# EAGLE board DataloggerE7 (EAGLE 9.3.1), part 1 of 2
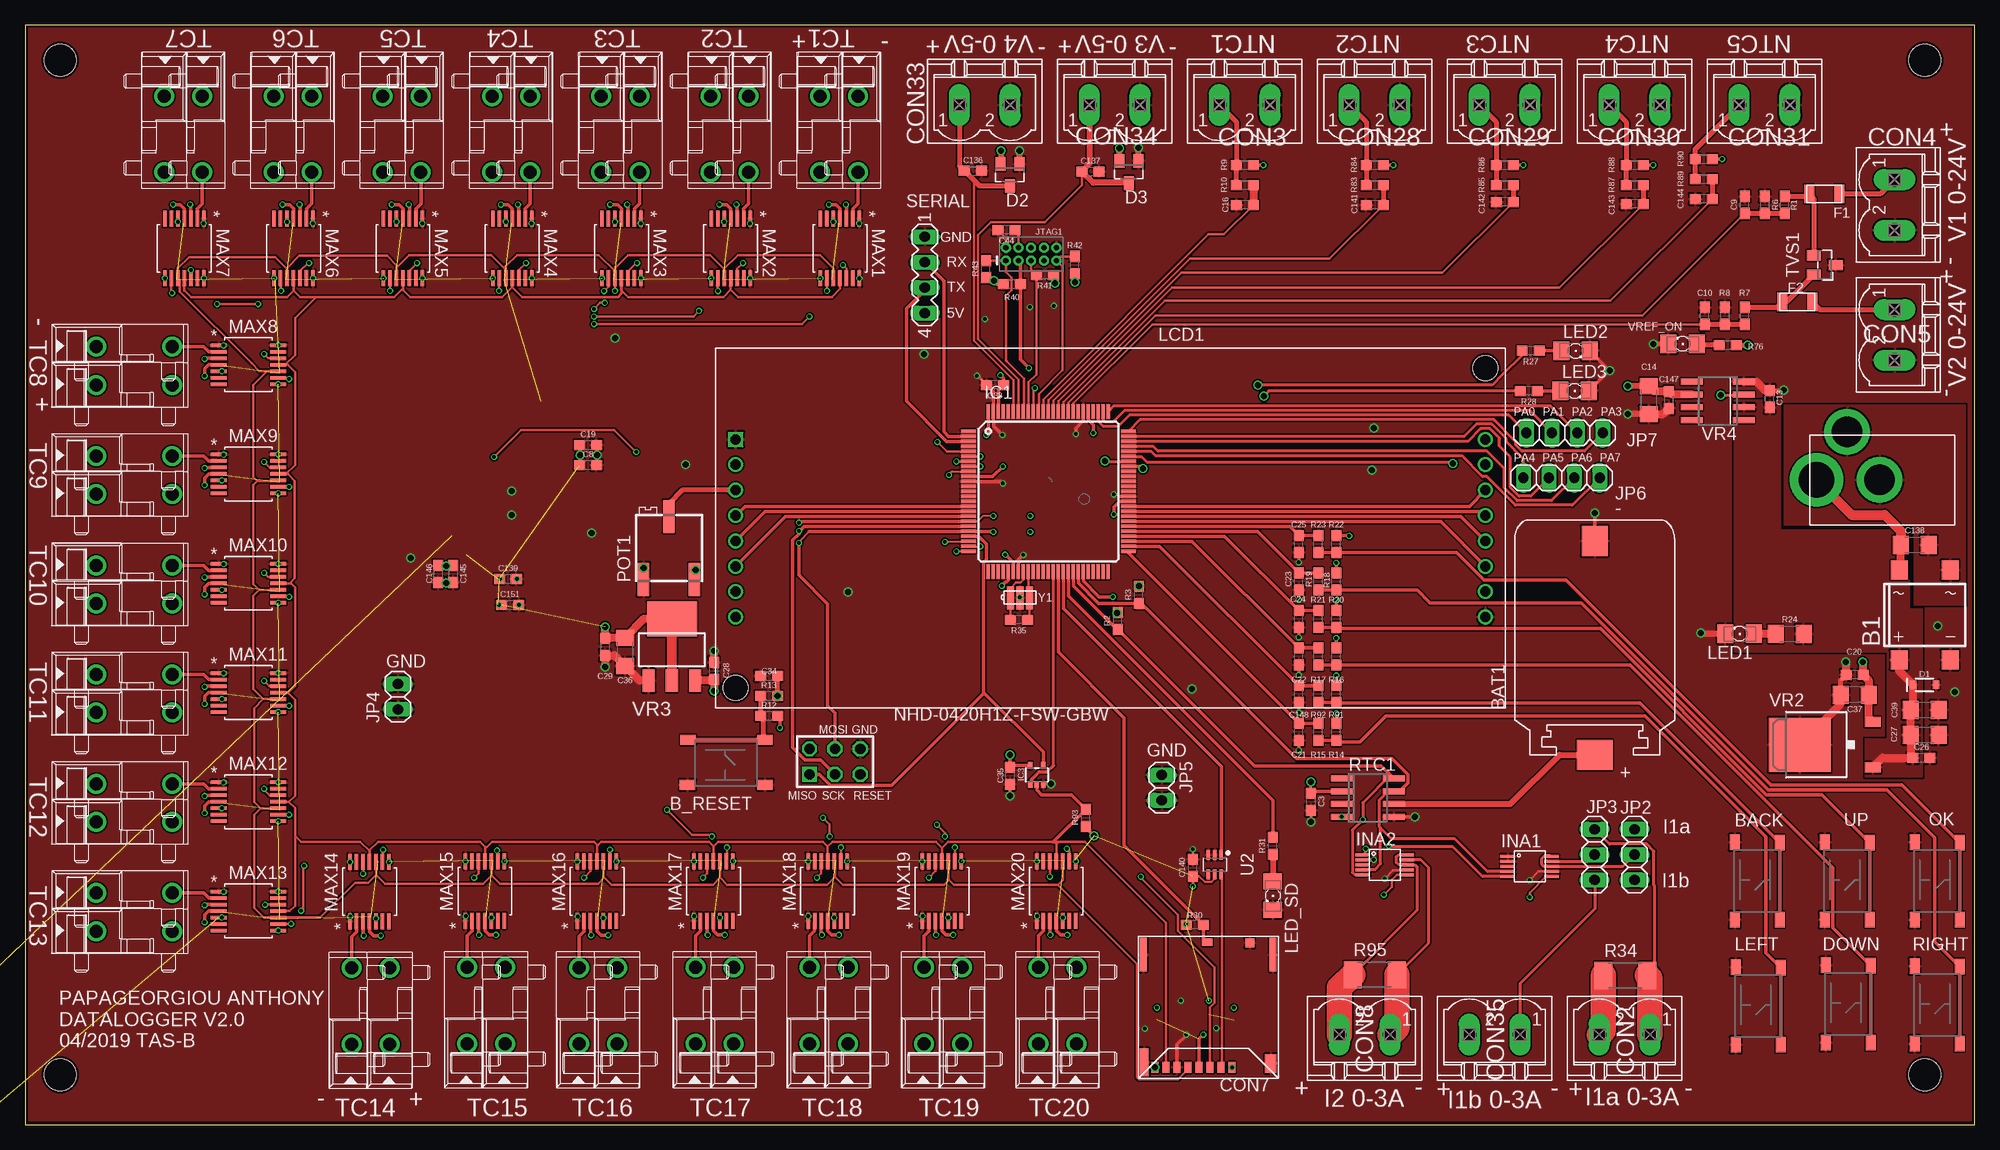
[diagram p0: board, top side]
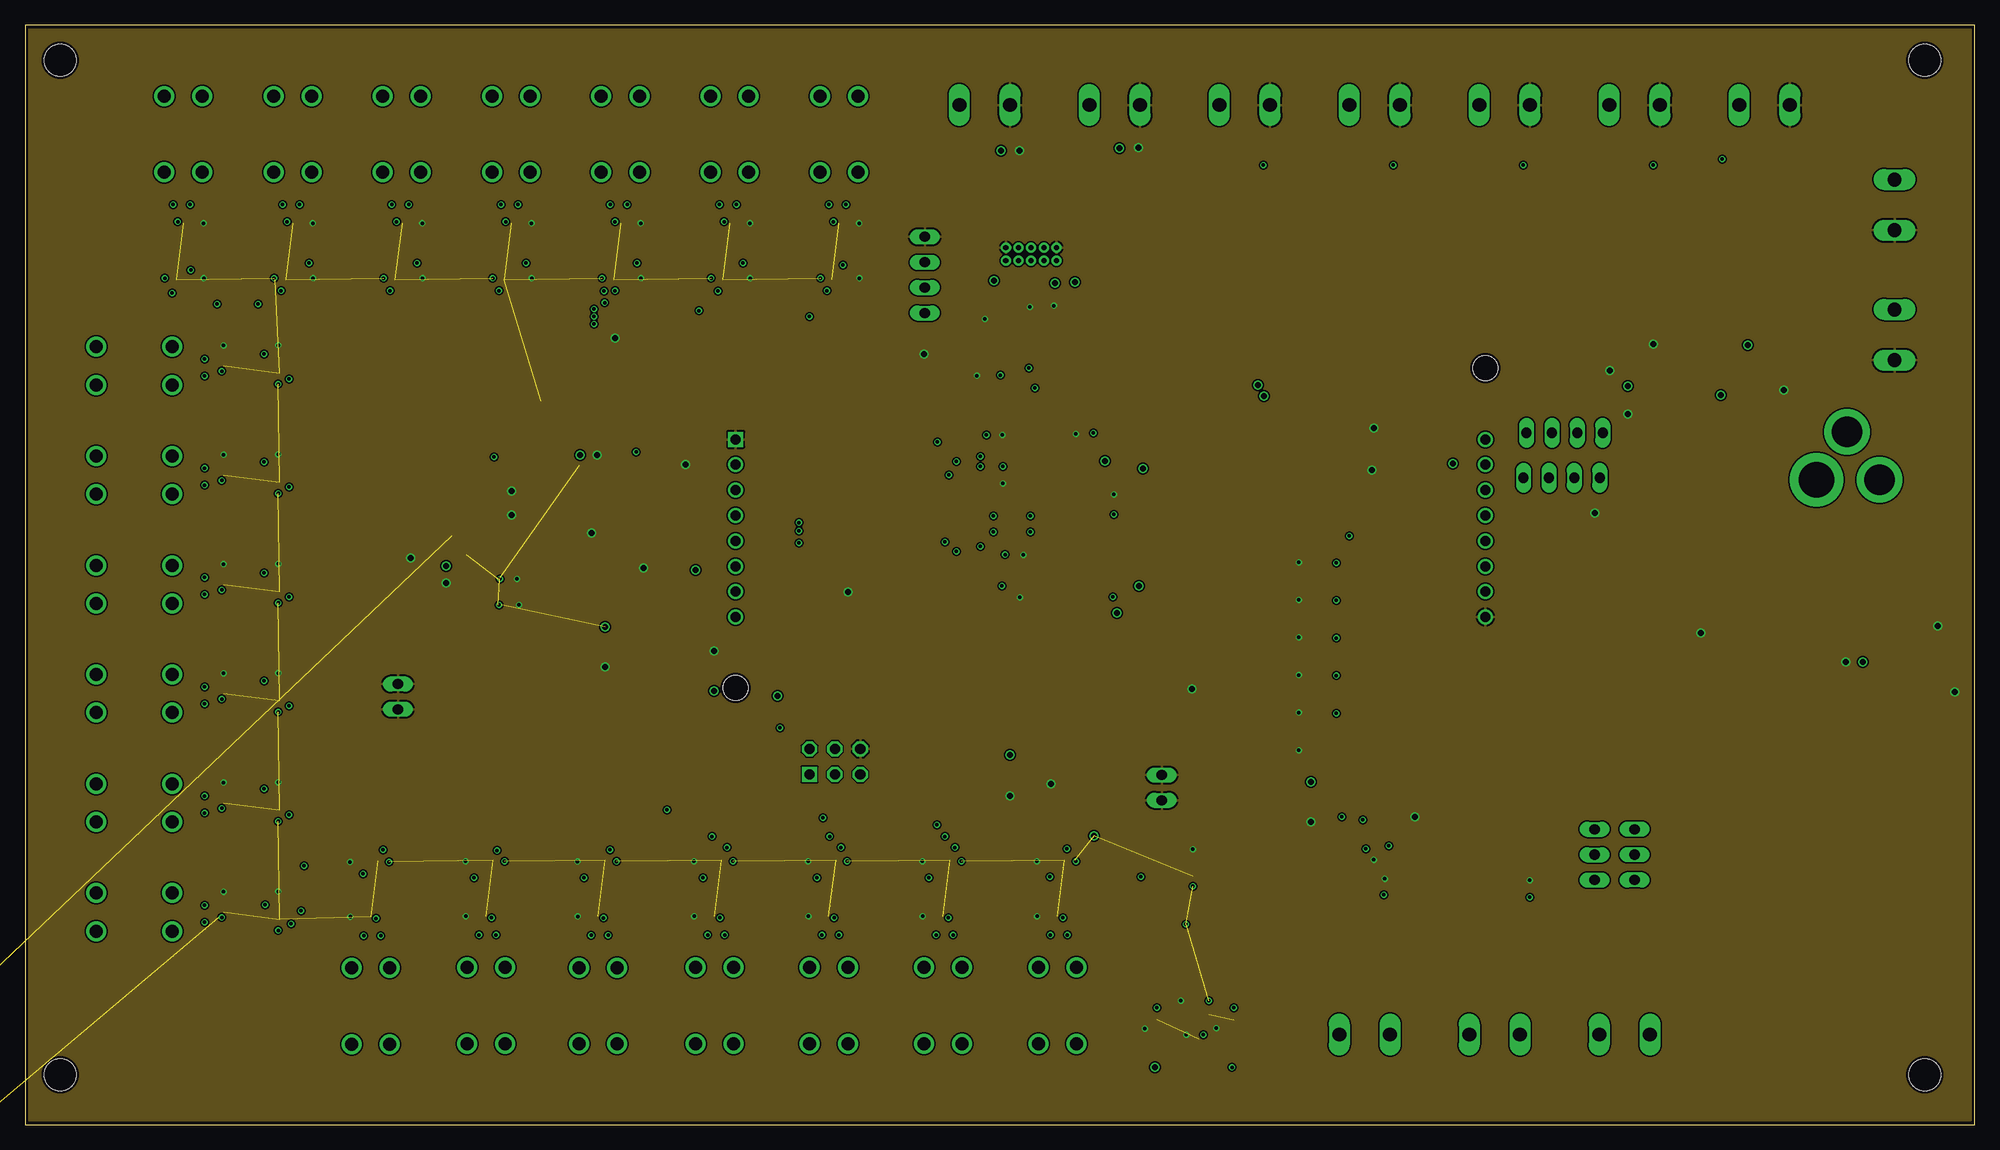
[diagram p1: board, inner layer GND]
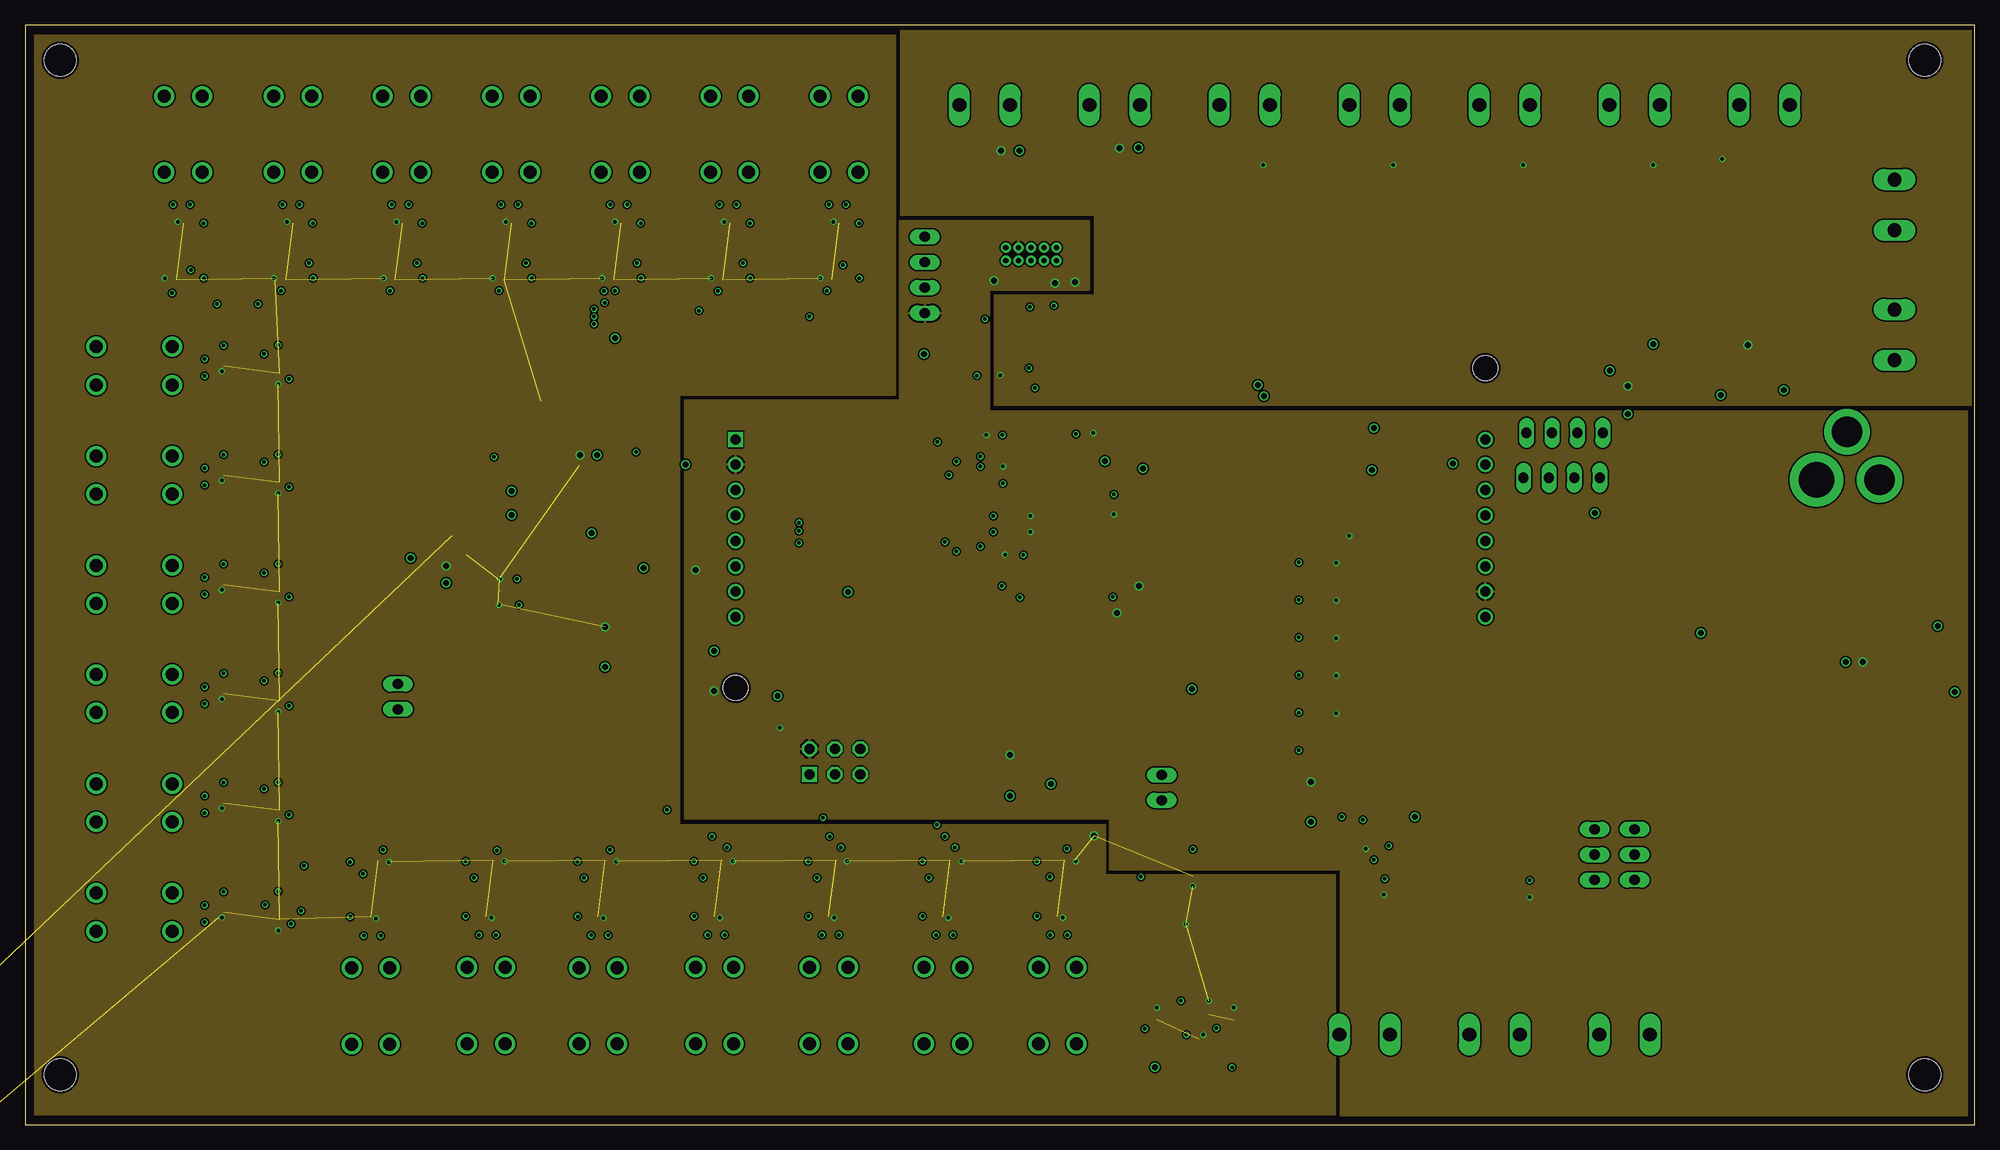
[diagram p2: board, inner layer VCC]
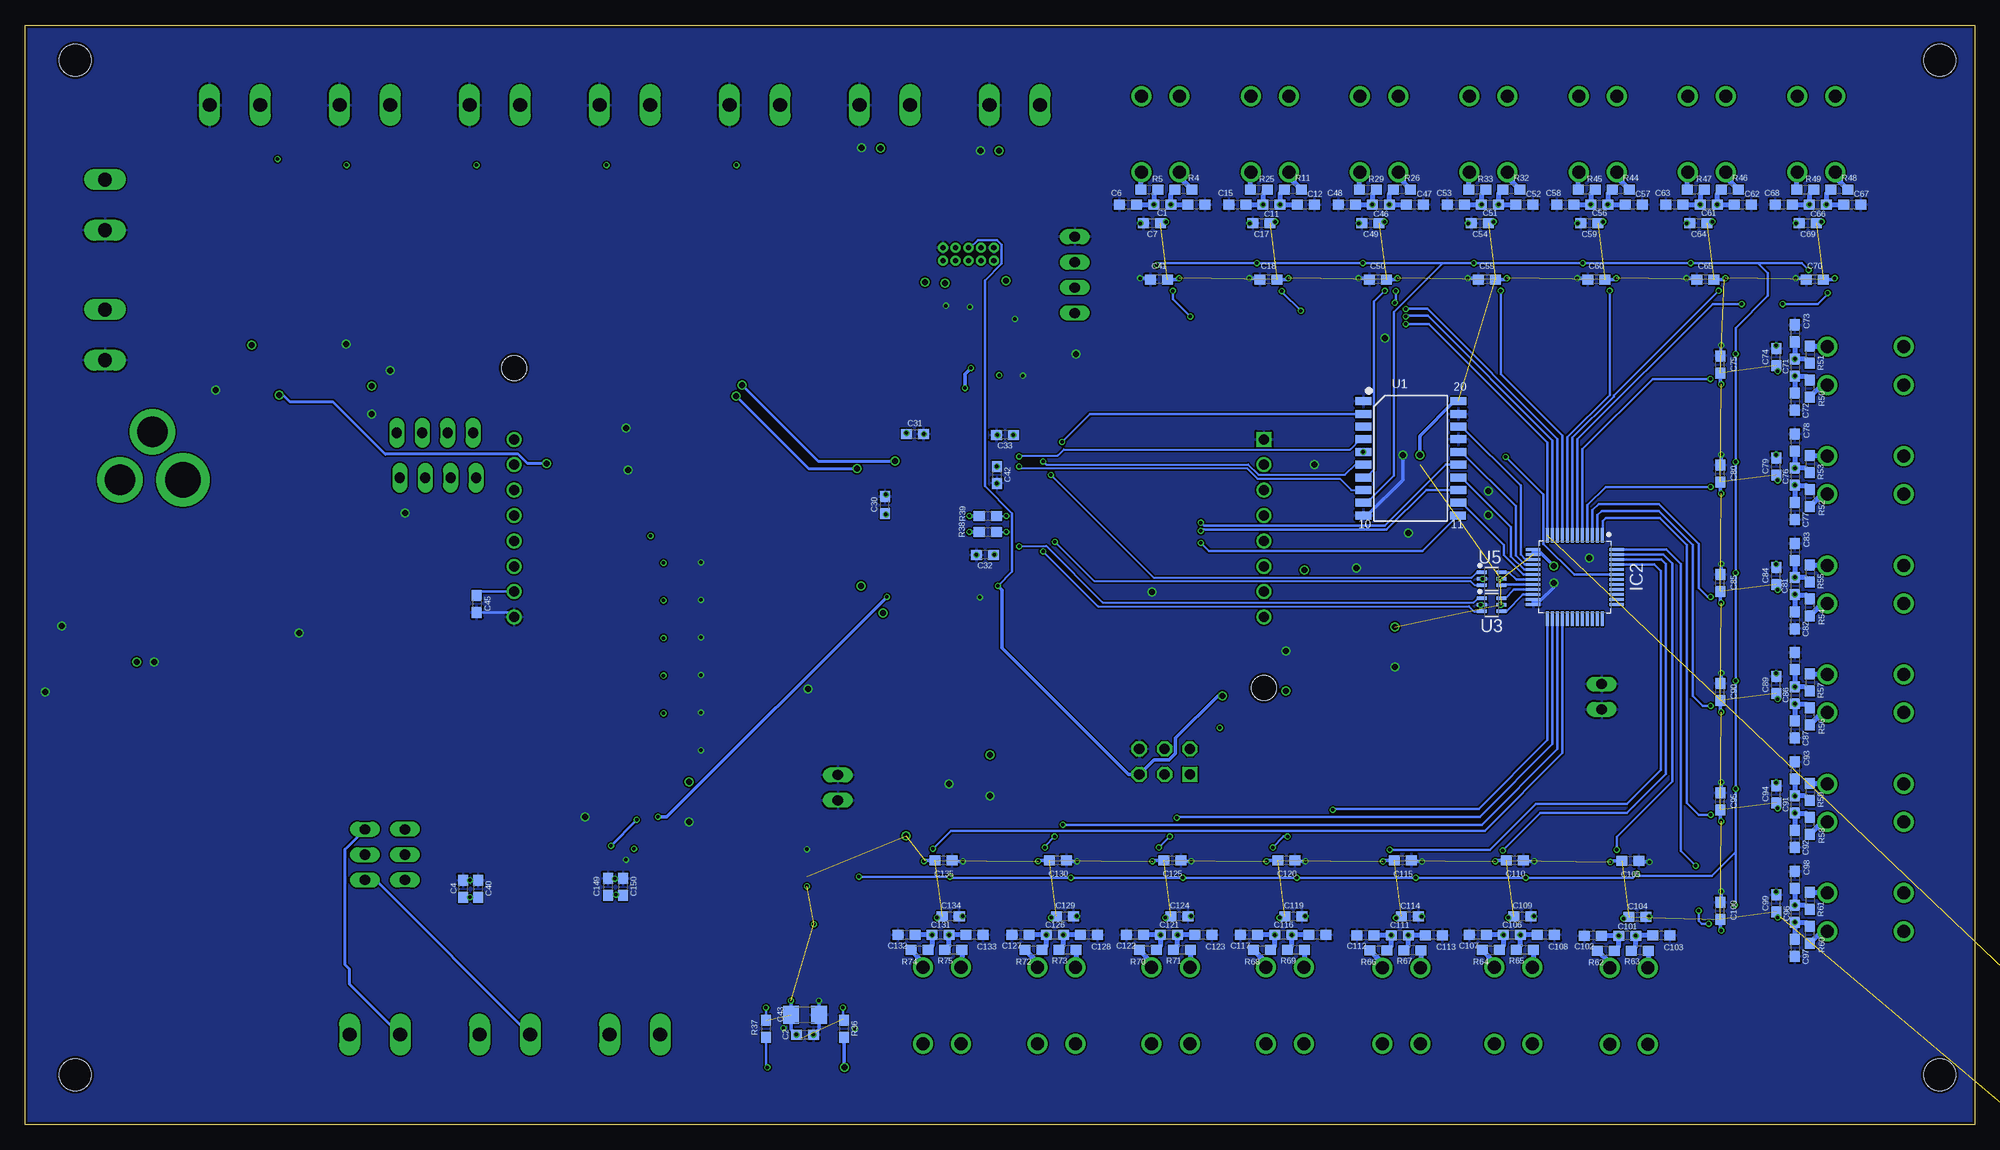
[diagram p3: board, bottom side, seen from below]

Size 195 x 110 mm. Coordinates in mm from the lower left corner, seen from the top.
Outline: 0,0 195,0 195,110 0,110 0,0
Copper layers (1+2*3+16): Top 0.018mm / dielectric 0.36mm / GND 0.035mm / dielectric 0.71mm / VCC 0.035mm / dielectric 0.36mm / Bottom 0.018mm
Design rules "eC_4Layer_PClass6_BaseCopperO18-I35_eCDefault": minimum track width 0.15mm, minimum drill 0.35mm, track to track 0.15mm, track to pad 0.15mm, pad to pad 0.15mm, via to via 0.15mm, smd to smd 0mil, copper to edge 0.25mm, drill to drill 0.35mm, minimum pad ring 0.175mm, minimum via ring 0.125mm, stop-mask expansion 0mil, vias tented up to drill 0.45mm, thermal gap 0.2mm
Net classes: 2 gnd: width 0.305 mm, drill 0.406 mm, clearance 0.203 mm
Holes 3.2 mm at 3.5,5 3.5,106.5 190,106.5 190,5

## Footprints (pad centres in the part's own frame; a part is rotated, then mirrored left to right if it is on the bottom)
DBS = smd 1.7 x 1.9: + -2.55,-4.5; - 2.55,-4.5; AC1 -2.55,4.5; AC2 2.55,4.5
222AMVBARSWITCH = smd 1.55 x 1: 1 0,0; 2 0,-4.5; 3 7.75,0; 4 7.7,-4.5
S8421-45R-CR2032 = smd 3.6 x 3: 1+ 0,0 | smd 2.6 x 3: 2- 0,21.4
0603 = smd 1.1 x 1: 1 -0.85,0; 2 0.85,0
1206 = smd 1.6 x 1.8: 1 -1.4,0; 2 1.4,0
1890471 = drill 1.3 pad 2: A -2.58,3.324; A1 -2.58,-0.486; B 5.04,3.324; B1 5.04,-0.486
MSTBV2 = drill 1.397 long: 1 -2.54,0; 2 2.54,0
JACK_RAPC722X = drill 3.56: 1 -0.5,9.8 | drill 3.05: 2 4.3,6.74; 3 -0.5,3.49
CONNECTOR_SDCARD_5033981892 = smd 0.7 x 1.1: 1 -2.6,6.48; 2 -1.5,6.48; 3 -0.4,6.48; 4 0.7,6.48; 5 1.8,6.48; 6 2.9,6.48; 7 4,6.48; 8 5.1,6.48 | smd 0.9 x 0.93: 9 -4.39,-5.985 | smd 1.05 x 0.78: 10 -0.125,-6.06 | smd 0.7 x 3.33: 11 -6.7,-4.8; 14 6.26,-4.8 | smd 1.14 x 1.83: 12 -6.48,6.085 | smd 0.86 x 2.8: 13 6.18,5.98
SOD-323 = smd 0.63 x 0.83: A 1.15,0; C -1.15,0
SOT23 = smd 1 x 1.4: 1 -0.95,-1.1; 2 0.95,-1.1; 3 0,1.1
0ZCJ_SERIES = smd 1 x 1.9: 1 -1.45,-0.1; 2 1.55,-0.1
TQFP100 = smd 1.5 x 0.35: 1 -8,6; 2 -8,5.5; 3 -8,5; 4 -8,4.5; 5 -8,4; 6 -8,3.5; 7 -8,3; 8 -8,2.5; 9 -8,2; 10 -8,1.5; 11 -8,1; 12 -8,0.5; 13 -8,0; 14 -8,-0.5; 15 -8,-1; 16 -8,-1.5; 17 -8,-2; 18 -8,-2.5; 19 -8,-3; 20 -8,-3.5; 21 -8,-4; 22 -8,-4.5; 23 -8,-5; 24 -8,-5.5; 25 -8,-6; 51 8,-6; 52 8,-5.5; 53 8,-5; 54 8,-4.5; 55 8,-4; 56 8,-3.5; 57 8,-3; 58 8,-2.5; 59 8,-2; 60 8,-1.5; 61 8,-1; 62 8,-0.5; 63 8,0; 64 8,0.5; 65 8,1; 66 8,1.5; 67 8,2; 68 8,2.5; 69 8,3; 70 8,3.5; 71 8,4; 72 8,4.5; 73 8,5; 74 8,5.5; 75 8,6 | smd 0.35 x 1.5: 26 -6,-8; 27 -5.5,-8; 28 -5,-8; 29 -4.5,-8; 30 -4,-8; 31 -3.5,-8; 32 -3,-8; 33 -2.5,-8; 34 -2,-8; 35 -1.5,-8; 36 -1,-8; 37 -0.5,-8; 38 0,-8; 39 0.5,-8; 40 1,-8; 41 1.5,-8; 42 2,-8; 43 2.5,-8; 44 3,-8; 45 3.5,-8; 46 4,-8; 47 4.5,-8; 48 5,-8; 49 5.5,-8; 50 6,-8; 76 6,8; 77 5.5,8; 78 5,8; 79 4.5,8; 80 4,8; 81 3.5,8; 82 3,8; 83 2.5,8; 84 2,8; 85 1.5,8; 86 1,8; 87 0.5,8; 88 0,8; 89 -0.5,8; 90 -1,8; 91 -1.5,8; 92 -2,8; 93 -2.5,8; 94 -3,8; 95 -3.5,8; 96 -4,8; 97 -4.5,8; 98 -5,8; 99 -5.5,8; 100 -6,8
QFP50P900X900X105-48 = smd 1.466 x 0.28: 1 -4.167,2.75; 2 -4.167,2.25; 3 -4.167,1.75; 4 -4.167,1.25; 5 -4.167,0.75; 6 -4.167,0.25; 7 -4.167,-0.25; 8 -4.167,-0.75; 9 -4.167,-1.25; 10 -4.167,-1.75; 11 -4.167,-2.25; 12 -4.167,-2.75; 25 4.167,-2.75; 26 4.167,-2.25; 27 4.167,-1.75; 28 4.167,-1.25; 29 4.167,-0.75; 30 4.167,-0.25; 31 4.167,0.25; 32 4.167,0.75; 33 4.167,1.25; 34 4.167,1.75; 35 4.167,2.25; 36 4.167,2.75 | smd 0.28 x 1.466: 13 -2.75,-4.167; 14 -2.25,-4.167; 15 -1.75,-4.167; 16 -1.25,-4.167; 17 -0.75,-4.167; 18 -0.25,-4.167; 19 0.25,-4.167; 20 0.75,-4.167; 21 1.25,-4.167; 22 1.75,-4.167; 23 2.25,-4.167; 24 2.75,-4.167; 37 2.75,4.167; 38 2.25,4.167; 39 1.75,4.167; 40 1.25,4.167; 41 0.75,4.167; 42 0.25,4.167; 43 -0.25,4.167; 44 -0.75,4.167; 45 -1.25,4.167; 46 -1.75,4.167; 47 -2.25,4.167; 48 -2.75,4.167
SOT353 = smd 0.42 x 0.7: 1 -0.65,-0.95; 2 0,-0.95; 3 0.65,-0.95; 4 0.65,0.95; 5 -0.65,0.95
TI-INA226 = smd 1.45 x 0.3: 1 -2.2,1; 2 -2.2,0.5; 3 -2.2,0; 4 -2.2,-0.5; 5 -2.2,-1; 6 2.2,-1; 7 2.2,-0.5; 8 2.2,0; 9 2.2,0.5; 10 2.2,1
AVR-ISP-6 = drill 1.016 square: 1 -2.54,-1.27 | drill 1.016 octagon: 2 -2.54,1.27; 3 0,-1.27; 4 0,1.27; 5 2.54,-1.27; 6 2.54,1.27
1X03 = drill 1.016 long: 1 -2.54,0; 2 0,0; 3 2.54,0
1X02 = drill 1.016 long: 1 -1.27,0; 2 1.27,0
1X04 = drill 1.016 long: 1 -3.81,0; 2 -1.27,0; 3 1.27,0; 4 3.81,0
2X5-PTH-1.27MM = drill 0.508 pad 1: 1 -2.54,-0.635; 2 -2.54,0.635; 3 -1.27,-0.635; 4 -1.27,0.635; 5 0,-0.635; 6 0,0.635; 7 1.27,-0.635; 8 1.27,0.635; 9 2.54,-0.635; 10 2.54,0.635
LCD_2X8PINS = drill 1 square: 1 -37.37,9.11 | drill 1: 2 -37.37,6.57; 3 -37.37,4.03; 4 -37.37,1.49; 5 -37.37,-1.05; 6 -37.37,-3.59; 7 -37.37,-6.13; 8 -37.37,-8.67; 9 37.63,9.11; 10 37.63,6.57; 11 37.63,4.03; 12 37.63,1.49; 13 37.63,-1.05; 14 37.63,-3.59; 15 37.63,-6.13; 16 37.63,-8.67 | hole 2.5: -37.37,-15.78; 37.63,16.22
1206' = smd 1.6 x 1.803: A -1.422,0; C 1.422,0
21-066J-14-M = smd 1.6 x 0.35: 1 -2.972,1.95; 2 -2.972,1.3; 3 -2.972,0.65; 4 -2.972,0; 5 -2.972,-0.65; 6 -2.972,-1.3; 7 -2.972,-1.95; 8 2.972,-1.95; 9 2.972,-1.3; 10 2.972,-0.65; 11 2.972,0; 12 2.972,0.65; 13 2.972,1.3; 14 2.972,1.95
TRIMMER_BOURNS_SMD = smd 1.19 x 3.3: 1 -2.55,-2.95; 2 0,3.35; 3 2.55,-2.95
R2010 = smd 1.8 x 2.7: 1 -2.2,0; 2 2.2,0
SOIC8 = smd 0.6 x 2.2: 1 -1.905,-2.6; 2 -0.635,-2.6; 3 0.635,-2.6; 4 1.905,-2.6; 5 1.905,2.6; 6 0.635,2.6; 7 -0.635,2.6; 8 -1.905,2.6
MA04-1 = drill 1.016 long: 1 -3.81,0; 2 -1.27,0; 3 1.27,0; 4 3.81,0
SOT23_3PAD = smd 1 x 1.4: 1 0.95,1.1; 2 -0.95,1.1; 3 0,-1.1
SOIC20 = smd 1.6 x 0.8: 1 -4.75,7.865; 2 -4.75,6.595; 3 -4.75,5.325; 4 -4.75,4.055; 5 -4.75,2.785; 6 -4.75,1.515; 7 -4.75,0.245; 8 -4.75,-1.025; 9 -4.75,-2.295; 10 -4.75,-3.565; 11 4.75,-3.565; 12 4.775,-2.295; 13 4.775,-1.025; 14 4.775,0.245; 15 4.775,1.515; 16 4.775,2.785; 17 4.775,4.055; 18 4.775,5.325; 19 4.775,6.595; 20 4.775,7.865
SOT363 = smd 0.973 x 0.389: 1 -0.978,0.65; 2 -0.978,0; 3 -0.978,-0.65; 4 0.978,-0.65; 5 0.978,0; 6 0.978,0.65
TO-252 = smd 1 x 1.6: 1 -2.28,-4.8; 2 2.28,-4.8 | smd 5.4 x 6.2: 3 0,2.5
SOT223-THERMAL = smd 1.219 x 2.235: 1 -2.311,-3.099; 2 0,-3.099; 3 2.311,-3.099 | smd 5 x 3.5: 4 0,3.099
SOIC8-LT1461 = smd 0.6 x 2.2: 1 -1.905,-2.6; 2 -0.635,-2.6; 3 0.635,-2.6; 4 1.905,-2.6; 5 1.905,2.6; 6 0.635,2.6; 7 -0.635,2.6; 8 -1.905,2.6
CSTCE_V = smd 0.7 x 2.3: 1 -0.95,0; 2 0,0; 3 0.95,0

## Placement (x,y rotation side)
B1  DBLS201G  [DBS]  190,51 0 top
B_BACK  222AMVBAR  [222AMVBARSWITCH]  171,20.5 90 top
B_DOWN  222AMVBAR  [222AMVBARSWITCH]  180.1,8.2 90 top
B_LEFT  222AMVBAR  [222AMVBARSWITCH]  171.1,8 90 top
B_OK  222AMVBAR  [222AMVBARSWITCH]  189,20.5 90 top
B_RESET  222AMVBAR  [222AMVBARSWITCH]  74,34 180 top
B_RIGHT  222AMVBAR  [222AMVBARSWITCH]  189,8.1 90 top
B_UP  222AMVBAR  [222AMVBARSWITCH]  180,20.5 90 top
BAT1  S8421-45R-CR2032  [S8421-45R-CR2032]  157,37 0 top
C1  0.1uF  [0603]  81.25,92.04 0 bottom
C2  0.1uF  [0603]  117,9 0 bottom
C3  0.1uF  [0603]  128.6,32.3 270 top
C4  0.1uF  [0603]  151.2,23.6 270 bottom
C5  10nF  [0603]  77.82,92.04 0 bottom
C6  10nF  [0603]  84.66,92.03 0 bottom
C7  0.1uF  [0603]  82.27,90.15 180 bottom
C8  0.1uF  [0603]  56.3,66 0 top
C9  10nF  [0603]  172,92 90 top
C10  10nF  [0603]  168,80.9 90 top
C11  0.1uF  [0603]  70.32,92.04 0 bottom
C12  10nF  [0603]  66.89,92.04 0 bottom
C13  1uF  [0603]  174.5,72.6 90 top
C14  10uF  [1206]  162.4,72.5 270 top
C15  10nF  [0603]  73.73,92.03 0 bottom
C16  10nF  [0603]  122,92 180 top
C17  0.1uF  [0603]  71.34,90.15 180 bottom
C18  1uF  [0603]  70.63,84.55 180 bottom
C19  1uF  [0603]  56.3,68 0 top
C20  0.1uF  [0603]  183,45 180 top
C21  0.1uF  [0603]  127.4,39.3 90 top
C22  0.1uF  [0603]  127.4,46.82 90 top
C23  0.1uF  [0603]  127.4,54.34 90 top
C24  0.1uF  [0603]  127.4,50.58 90 top
C25  0.1uF  [0603]  127.4,58.1 90 top
C26  0.1uF  [0603]  189.68,36.7 0 top
C27  10uF  [1206]  190,39 0 top
C28  0.1uF  [0603]  68.9,45.4 90 top
C29  0.1uF  [0603]  58,47.8 270 top
C30  0.1uF  [0603]  109,62 90 bottom
C31  0.1uF  [0603]  106,69.1 0 bottom
C32  0.1uF  [0603]  99,57 180 bottom
C33  0.1uF  [0603]  97,69 180 bottom
C34  0.1uF  [0603]  74.4,44.9 0 top
C35  0.1uF  [0603]  98.5,34.9 270 top
C36  10uF  [1206]  60,47.3 270 top
C37  10uF  [1206]  183,43 180 top
C38  0.1uF  [0603]  97,74 180 top
C39  47uF  [1206]  190,41.5 0 top
C40  1uF  [0603]  149.7,23.6 270 bottom
C41  1uF  [0603]  81.56,84.55 180 bottom
C42  0.1uF  [0603]  97.8,65 270 bottom
C43  47uF  [1206]  117,11 0 bottom
C44  0.1uF  [0603]  98.15,89.49 180 top
C45  0.1uF  [0603]  149.8,52.1 270 bottom
C46  0.1uF  [0603]  59.39,92.04 0 bottom
C47  10nF  [0603]  55.96,92.04 0 bottom
C48  10nF  [0603]  62.8,92.03 0 bottom
C49  0.1uF  [0603]  60.41,90.15 180 bottom
C50  1uF  [0603]  59.7,84.55 180 bottom
C51  0.1uF  [0603]  48.46,92.04 0 bottom
C52  10nF  [0603]  45.03,92.04 0 bottom
C53  10nF  [0603]  51.87,92.03 0 bottom
C54  0.1uF  [0603]  49.48,90.15 180 bottom
C55  1uF  [0603]  48.77,84.55 180 bottom
C56  0.1uF  [0603]  37.53,92.04 0 bottom
C57  10nF  [0603]  34.1,92.04 0 bottom
C58  10nF  [0603]  40.94,92.03 0 bottom
C59  0.1uF  [0603]  38.55,90.15 180 bottom
C60  1uF  [0603]  37.84,84.55 180 bottom
C61  0.1uF  [0603]  26.6,92.04 0 bottom
C62  10nF  [0603]  23.17,92.04 0 bottom
C63  10nF  [0603]  30.01,92.03 0 bottom
C64  0.1uF  [0603]  27.62,90.15 180 bottom
C65  1uF  [0603]  26.91,84.55 180 bottom
C66  0.1uF  [0603]  15.67,92.04 0 bottom
C67  10nF  [0603]  12.24,92.04 0 bottom
C68  10nF  [0603]  19.08,92.03 0 bottom
C69  0.1uF  [0603]  16.69,90.15 180 bottom
C70  1uF  [0603]  15.98,84.55 180 bottom
C71  0.1uF  [0603]  17.96,75.74 270 bottom
C72  10nF  [0603]  17.96,72.31 270 bottom
C73  10nF  [0603]  17.97,79.15 270 bottom
C74  0.1uF  [0603]  19.85,76.76 90 bottom
C75  1uF  [0603]  25.45,76.05 90 bottom
C76  0.1uF  [0603]  17.96,64.81 270 bottom
C77  10nF  [0603]  17.96,61.38 270 bottom
C78  10nF  [0603]  17.97,68.22 270 bottom
C79  0.1uF  [0603]  19.85,65.83 90 bottom
C80  1uF  [0603]  25.45,65.12 90 bottom
C81  0.1uF  [0603]  17.96,53.88 270 bottom
C82  10nF  [0603]  17.96,50.45 270 bottom
C83  10nF  [0603]  17.97,57.29 270 bottom
C84  0.1uF  [0603]  19.85,54.9 90 bottom
C85  1uF  [0603]  25.45,54.19 90 bottom
C86  0.1uF  [0603]  17.96,42.95 270 bottom
C87  10nF  [0603]  17.96,39.52 270 bottom
C88  10nF  [0603]  17.97,46.36 270 bottom
C89  0.1uF  [0603]  19.85,43.97 90 bottom
C90  1uF  [0603]  25.45,43.26 90 bottom
C91  0.1uF  [0603]  17.96,32.02 270 bottom
C92  10nF  [0603]  17.96,28.59 270 bottom
C93  10nF  [0603]  17.97,35.43 270 bottom
C94  0.1uF  [0603]  19.85,33.04 90 bottom
C95  1uF  [0603]  25.45,32.33 90 bottom
C96  0.1uF  [0603]  17.96,21.09 270 bottom
C97  10nF  [0603]  17.96,17.66 270 bottom
C98  10nF  [0603]  17.97,24.5 270 bottom
C99  0.1uF  [0603]  19.85,22.11 90 bottom
C100  1uF  [0603]  25.45,21.4 90 bottom
C101  0.1uF  [0603]  34.73,18.89 180 bottom
C102  10nF  [0603]  38.16,18.89 180 bottom
C103  10nF  [0603]  31.32,18.9 180 bottom
C104  0.1uF  [0603]  33.71,20.78 0 bottom
C105  1uF  [0603]  34.42,26.38 0 bottom
C106  0.1uF  [0603]  46.27,18.96 180 bottom
C107  10nF  [0603]  49.7,18.96 180 bottom
C108  10nF  [0603]  42.86,18.97 180 bottom
C109  0.1uF  [0603]  45.25,20.85 0 bottom
C110  1uF  [0603]  45.96,26.45 0 bottom
C111  0.1uF  [0603]  57.49,18.93 180 bottom
C112  10nF  [0603]  60.92,18.93 180 bottom
C113  10nF  [0603]  54.08,18.94 180 bottom
C114  0.1uF  [0603]  56.47,20.82 0 bottom
C115  1uF  [0603]  57.18,26.42 0 bottom
C116  0.1uF  [0603]  69.13,18.96 180 bottom
C117  10nF  [0603]  72.56,18.96 180 bottom
C118  10nF  [0603]  65.72,18.97 180 bottom
C119  0.1uF  [0603]  68.11,20.85 0 bottom
C120  1uF  [0603]  68.82,26.45 0 bottom
C121  0.1uF  [0603]  80.56,18.96 180 bottom
C122  10nF  [0603]  83.99,18.96 180 bottom
C123  10nF  [0603]  77.15,18.97 180 bottom
C124  0.1uF  [0603]  79.54,20.85 0 bottom
C125  1uF  [0603]  80.25,26.45 0 bottom
C126  0.1uF  [0603]  91.99,18.96 180 bottom
C127  10nF  [0603]  95.42,18.96 180 bottom
C128  10nF  [0603]  88.58,18.97 180 bottom
C129  0.1uF  [0603]  90.97,20.85 0 bottom
C130  1uF  [0603]  91.68,26.45 0 bottom
C131  0.1uF  [0603]  103.42,18.96 180 bottom
C132  10nF  [0603]  106.85,18.96 180 bottom
C133  10nF  [0603]  100.01,18.97 180 bottom
C134  0.1uF  [0603]  102.4,20.85 0 bottom
C135  1uF  [0603]  103.11,26.45 0 bottom
C136  10nF  [0603]  94.8,95.41 0 top
C137  10nF  [0603]  106.55,95.35 0 top
C138  47uF  [1206]  189,58 0 top
C139  0.1uF  [0603]  48.3,54.6 0 top
C140  0.1uF  [0603]  116.8,25.7 90 top
C141  10nF  [0603]  135,92 180 top
C142  10nF  [0603]  148,92.3 180 top
C143  10nF  [0603]  161,92.1 180 top
C144  10nF  [0603]  167.9,92.6 180 top
C145  1uF  [0603]  42.8,55.1 270 top
C146  0.1uF  [0603]  41.3,55.1 270 top
C147  0.1uF  [0603]  164.4,72.5 270 top
C148  0.1uF  [0603]  127.4,43.06 90 top
C149  0.1uF  [0603]  136.7,23.8 270 bottom
C150  1uF  [0603]  135.2,23.8 270 bottom
C151  0.1uF  [0603]  48.5,52 0 top
CON1  1890471  [1890471]  79.99,100.32 270 top
CON2  CON_PHOENIX_508_2  [MSTBV2]  160,9 180 top
CON3  CON_PHOENIX_508_2  [MSTBV2]  122,102 0 top
CON4  CON_PHOENIX_508_2  [MSTBV2]  187,92 270 top
CON5  CON_PHOENIX_508_2  [MSTBV2]  187,79 270 top
CON6  RAPC722X  [JACK_RAPC722X]  189,65 90 top
CON7  MOLEX_5033981892  [CONNECTOR_SDCARD_5033981892]  118.13,12.2 180 top
CON8  CON_PHOENIX_508_2  [MSTBV2]  134,9 180 top
CON9  1890471  [1890471]  69.06,100.32 270 top
CON10  1890471  [1890471]  58.13,100.32 270 top
CON11  1890471  [1890471]  47.2,100.32 270 top
CON12  1890471  [1890471]  36.27,100.32 270 top
CON13  1890471  [1890471]  25.34,100.32 270 top
CON14  1890471  [1890471]  14.41,100.32 270 top
CON15  1890471  [1890471]  9.68,74.48 0 top
CON16  1890471  [1890471]  9.68,63.55 0 top
CON17  1890471  [1890471]  9.68,52.62 0 top
CON18  1890471  [1890471]  9.68,41.69 0 top
CON19  1890471  [1890471]  9.68,30.76 0 top
CON20  1890471  [1890471]  9.68,19.83 0 top
CON21  1890471  [1890471]  35.99,10.61 90 top
CON22  1890471  [1890471]  47.53,10.68 90 top
CON23  1890471  [1890471]  58.75,10.65 90 top
CON24  1890471  [1890471]  70.39,10.68 90 top
CON25  1890471  [1890471]  81.82,10.68 90 top
CON26  1890471  [1890471]  93.25,10.68 90 top
CON27  1890471  [1890471]  104.68,10.68 90 top
CON28  CON_PHOENIX_508_2  [MSTBV2]  135,102 0 top
CON29  CON_PHOENIX_508_2  [MSTBV2]  148,102 0 top
CON30  CON_PHOENIX_508_2  [MSTBV2]  161,102 0 top
CON31  CON_PHOENIX_508_2  [MSTBV2]  174,102 0 top
CON33  CON_PHOENIX_508_2  [MSTBV2]  96,102 0 top
CON34  CON_PHOENIX_508_2  [MSTBV2]  109,102 0 top
CON35  CON_PHOENIX_508_2  [MSTBV2]  147,9 180 top
D1  [SOD-323]  190,44 0 top
D2  BAT54S  [SOT23]  98.5,95 180 top
D3  BAT54S  [SOT23]  110.4,95.3 180 top
F1  [0ZCJ_SERIES]  180,93 180 top
F2  [0ZCJ_SERIES]  177.3,82.2 180 top
IC1  ATMEGA2560-16AU  [TQFP100]  102.36,63.34 0 top
IC2  ADG732  [QFP50P900X900X105-48]  39.97,54.77 270 bottom
IC3  74AHCT1G126  [SOT353]  101.2,35 0 top
INA1  TI-INA226  [TI-INA226]  150.51,25.81 0 top
INA2  TI-INA226  [TI-INA226]  136,26 0 top
JP1  AVR-ISP-6  [AVR-ISP-6]  81.01,36.3 0 top
JP2  [1X03]  161,27 90 top
JP3  [1X03]  157,27 270 top
JP4  [1X02]  37.3,42.8 90 top
JP5  [1X02]  113.7,33.7 270 top
JP6  [1X04]  153.7,64.7 180 top
JP7  [1X04]  154,69.2 180 top
JTAG1  AVR_DEBUG  [2X5-PTH-1.27MM]  100.64,87.08 0 top
LCD1  NHD-0420H1Z-FSW-GBW  [LCD_2X8PINS]  108.46,59.44 0 top
LED1  [1206']  171.5,49.1 180 top
LED2  [1206']  155.1,77.4 0 top
LED3  [1206']  155,73.4 0 top
LED_SD  [1206']  124.8,22.9 270 top
MAX1  MAX31856  [21-066J-14-M]  81.52,87.64 270 top
MAX2  MAX31856  [21-066J-14-M]  70.59,87.64 270 top
MAX3  MAX31856  [21-066J-14-M]  59.66,87.64 270 top
MAX4  MAX31856  [21-066J-14-M]  48.73,87.64 270 top
MAX5  MAX31856  [21-066J-14-M]  37.8,87.64 270 top
MAX6  MAX31856  [21-066J-14-M]  26.87,87.64 270 top
MAX7  MAX31856  [21-066J-14-M]  15.94,87.64 270 top
MAX8  MAX31856  [21-066J-14-M]  22.36,76.01 0 top
MAX9  MAX31856  [21-066J-14-M]  22.36,65.08 0 top
MAX10  MAX31856  [21-066J-14-M]  22.36,54.15 0 top
MAX11  MAX31856  [21-066J-14-M]  22.36,43.22 0 top
MAX12  MAX31856  [21-066J-14-M]  22.36,32.29 0 top
MAX13  MAX31856  [21-066J-14-M]  22.36,21.36 0 top
MAX14  MAX31856  [21-066J-14-M]  34.46,23.29 90 top
MAX15  MAX31856  [21-066J-14-M]  46,23.36 90 top
MAX16  MAX31856  [21-066J-14-M]  57.22,23.33 90 top
MAX17  MAX31856  [21-066J-14-M]  68.86,23.36 90 top
MAX18  MAX31856  [21-066J-14-M]  80.29,23.36 90 top
MAX19  MAX31856  [21-066J-14-M]  91.72,23.36 90 top
MAX20  MAX31856  [21-066J-14-M]  103.15,23.36 90 top
POT1  3361P-1-103GLF  [TRIMMER_BOURNS_SMD]  64.4,57.49 0 top
R1  39k  [0603]  176,92 90 top
R2  10k  [0603]  109.3,50.4 90 top
R3  10k  [0603]  111.4,53 90 top
R4  100R  [0603]  79.12,93.54 180 bottom
R5  100R  [0603]  82.52,93.54 0 bottom
R6  10k  [0603]  174,92 270 top
R7  39k  [0603]  172,80.9 90 top
R8  10k  [0603]  170,80.9 270 top
R9  10k  [0603]  122,96 0 top
R10  100R  [0603]  122,94 0 top
R11  100R  [0603]  68.19,93.54 180 bottom
R12  10k  [0603]  74.4,40.9 0 top
R13  10k  [0603]  74.4,42.9 0 top
R14  10k  [0603]  131.15,39.3 90 top
R15  10k  [0603]  129.35,39.3 90 top
R16  10k  [0603]  131.15,46.82 90 top
R17  10k  [0603]  129.35,46.82 90 top
R18  10k  [0603]  131.15,54.34 90 top
R19  10k  [0603]  129.35,54.34 90 top
R20  10k  [0603]  131.15,50.58 90 top
R21  10k  [0603]  129.35,50.58 90 top
R22  10k  [0603]  131.15,58.1 90 top
R23  10k  [0603]  129.35,58.1 90 top
R24  470R  [1206]  176.5,49.1 0 top
R25  100R  [0603]  71.59,93.54 0 bottom
R26  100R  [0603]  57.26,93.54 180 bottom
R27  1k5  [0603]  150.6,77.4 180 top
R28  1k5  [0603]  150.4,73.4 180 top
R29  100R  [0603]  60.66,93.54 0 bottom
R30  10k  [0603]  117,20 180 top
R31  1k5  [0603]  124.8,27.9 90 top
R32  100R  [0603]  46.33,93.54 180 bottom
R33  100R  [0603]  49.73,93.54 0 bottom
R34  2m  [R2010]  160.07,14.92 180 top
R35  1M  [0603]  99.4,50.5 180 top
R36  10k  [0603]  113.1,9.6 270 bottom
R37  10k  [0603]  120.9,9.6 270 bottom
R38  10k  [0603]  98.7,59.3 0 bottom
R39  10k  [0603]  98.7,60.9 0 bottom
R40  10k  [0603]  98.7,84.1 0 top
R41  10k  [0603]  102,85 180 top
R42  10k  [0603]  105,86 90 top
R43  10k  [0603]  96.1,85.6 90 top
R44  100R  [0603]  35.4,93.54 180 bottom
R45  100R  [0603]  38.8,93.54 0 bottom
R46  100R  [0603]  24.47,93.54 180 bottom
R47  100R  [0603]  27.87,93.54 0 bottom
R48  100R  [0603]  13.54,93.54 180 bottom
R49  100R  [0603]  16.94,93.54 0 bottom
R50  100R  [0603]  16.46,73.61 90 bottom
R51  100R  [0603]  16.46,77.01 270 bottom
R52  100R  [0603]  16.46,62.68 90 bottom
R53  100R  [0603]  16.46,66.08 270 bottom
R54  100R  [0603]  16.46,51.75 90 bottom
R55  100R  [0603]  16.46,55.15 270 bottom
R56  100R  [0603]  16.46,40.82 90 bottom
R57  100R  [0603]  16.46,44.22 270 bottom
R58  100R  [0603]  16.46,29.89 90 bottom
R59  100R  [0603]  16.46,33.29 270 bottom
R60  100R  [0603]  16.46,18.96 90 bottom
R61  100R  [0603]  16.46,22.36 270 bottom
R62  100R  [0603]  36.86,17.39 0 bottom
R63  100R  [0603]  33.46,17.39 180 bottom
R64  100R  [0603]  48.4,17.46 0 bottom
R65  100R  [0603]  45,17.46 180 bottom
R66  100R  [0603]  59.62,17.43 0 bottom
R67  100R  [0603]  56.22,17.43 180 bottom
R68  100R  [0603]  71.26,17.46 0 bottom
R69  100R  [0603]  67.86,17.46 180 bottom
R70  100R  [0603]  82.69,17.46 0 bottom
R71  100R  [0603]  79.29,17.46 180 bottom
R72  100R  [0603]  94.12,17.46 0 bottom
R73  100R  [0603]  90.72,17.46 180 bottom
R74  100R  [0603]  105.55,17.46 0 bottom
R75  100R  [0603]  102.15,17.46 180 bottom
R76  1k5  [0603]  170.3,78 0 top
R77  10k  [0603]  -145.9,-119.4 0 top  (outside the outline)
R83  100R  [0603]  135,94 0 top
R84  10k  [0603]  135,96 0 top
R85  100R  [0603]  148,94 0 top
R86  10k  [0603]  148,96 0 top
R87  100R  [0603]  161,94 0 top
R88  10k  [0603]  161,96 0 top
R89  100R  [0603]  167.9,94.6 0 top
R90  10k  [0603]  167.9,96.6 0 top
R91  10k  [0603]  131.15,43.06 90 top
R92  10k  [0603]  129.35,43.06 90 top
R93  10k  [0603]  106.1,30.7 90 top
R95  2m  [R2010]  135,15 180 top
RTC1  [SOIC8]  134.3,32.7 270 top
SERIAL  [MA04-1]  90,85 270 top
TVS1  GSOT24C  [SOT23_3PAD]  180,86 90 top
U1  74LVC2244AD  [SOIC20]  56.4,64.5 0 bottom
U2  74LVC2G17SOT363  [SOT363]  119,26 270 top
U3  74LVC2G17SOT363  [SOT363]  48.3,52 0 bottom
U5  74LVC2G17SOT363  [SOT363]  48.3,54.6 0 bottom
VR2  LM78M05  [TO-252]  180,38 90 top
VR3  LD1117-33  [SOT223-THERMAL]  64.7,47.5 0 top
VR4  LT1461DHS8  [SOIC8-LT1461]  169.3,72.4 90 top
VREF_ON  [1206']  165.8,78.1 180 top
Y1  [CSTCE_V]  99.5,52.7 0 top

## Library data of the parts
B1 = rectifier
B_BACK B_DOWN B_LEFT B_OK B_RESET B_RIGHT B_UP = Librairie Anthony; MPN: 222AMVBAR; N_MOUSER: 774-222AMVBAR
BAT1 = DavidThales
C1-C151 IC2 IC3 JTAG1 R1-R77 R83-R93 R95 = AAAnthony
CON1-CON5 CON8-CON31 CON33-CON35 U2 U3 U5 VR4 = Librairie Anthony
CON6 CON7 F1 F2 LCD1 POT1 RTC1 TVS1 Y1 = Aymeric_Thales
D1 = Librairie Anthony; MPN: CMDZ15L TR; N_MOUSER: 610-CMDZ15L; PROD_ID: DIO-12442
D2 D3 = diode
IC1 = atmel-2005
INA1 INA2 = FaBo-Mems
JP1 = atmel-1
JP2-JP7 = pinhead
LED1-LED3 LED_SD VREF_ON = adafruit
MAX1-MAX20 = Librairie Anthony; MPN: MAX31856MUD+; N_MOUSER: 700-MAX31856MUD+
SERIAL = con-lstb; OC_FARNELL: unknown; OC_NEWARK: unknown
U1 = Librairie Anthony; MPN: SN74LVC2244ADWR; N_MOUSER: 595-SN74LVC2244ADWR
VR2 = Librairie Anthony; MPN: LM78M05CDTX/NOPB; N_MOUSER: 926-LM78M05CDTX/NOPB
VR3 = Librairie Anthony; MPN: LD1117S33CTR; N_MOUSER: 511-LD1117S33C

## Nets
3V3: C2.1 C7.1 C8.1 C17.1 C18.1 C19.1 C29.1 C36.1 C41.1 C43.1 C49.1 C50.1 C54.1 C55.1 C59.1 C60.1 C64.1 C65.1 C69.1 C70.1 C74.1 C75.1 C79.1 C80.1 C84.1 C85.1 C89.1 C90.1 C94.1 C95.1 C99.1 C100.1 C104.1 C105.1 C109.1 C110.1 C114.1 C115.1 C119.1 C120.1 C124.1 C125.1 C129.1 C130.1 C134.1 C135.1 C139.1 C140.1 C145.1 C146.1 C151.1 CON7.4 IC2.13 IC2.14 MAX1.5 MAX1.8 MAX2.5 MAX2.8 MAX3.5 MAX3.8 MAX4.5 MAX4.8 MAX5.5 MAX5.8 MAX6.5 MAX6.8 MAX7.5 MAX7.8 MAX8.5 MAX8.8 MAX9.5 MAX9.8 MAX10.5 MAX10.8 MAX11.5 MAX11.8 MAX12.5 MAX12.8 MAX13.5 MAX13.8 MAX14.5 MAX14.8 MAX15.5 MAX15.8 MAX16.5 MAX16.8 MAX17.5 MAX17.8 MAX18.5 MAX18.8 MAX19.5 MAX19.8 MAX20.5 MAX20.8 R30.2 R36.1 R37.1 R77.1 R93.1 U1.20 U2.5 U3.5 U5.5 VR3.2 VR3.4
5V: C3.1 C4.2 C20.1 C28.1 C30.1 C31.1 C32.1 C33.1 C35.1 C37.1 C40.2 C42.1 C44.1 C45.1 C149.2 C150.2 IC1.10 IC1.31 IC1.61 IC1.80 IC1.100 IC3.5 INA1.6 INA2.1 INA2.6 JP1.2 JTAG1.4 LCD1.2 LCD1.15 POT1.3 R2.2 R3.2 R12.2 R14.2 R16.2 R18.2 R20.2 R22.2 R38.1 R39.1 R40.1 R41.1 R42.1 R43.1 R91.2 RTC1.2 SERIAL.4 VR2.2 VR3.3
5VREF: C14.1 C38.1 C147.1 D2.2 D3.2 IC1.98 R9.2 R76.2 R84.2 R86.2 R88.2 R90.2 VR4.6
9V: B1.AC1 C138.1 CON6.1
!E!: IC1.18 LCD1.6
BIAS: CON1.A CON1.B MAX1.2 R5.1
BIAS1: CON9.A CON9.B MAX2.2 R25.1
BIAS2: CON10.A CON10.B MAX3.2 R29.1
BIAS3: CON11.A CON11.B MAX4.2 R33.1
BIAS4: CON19.A CON19.B MAX12.2 R59.1
BIAS5: CON12.A CON12.B MAX5.2 R45.1
BIAS6: CON13.A CON13.B MAX6.2 R47.1
BIAS7: CON14.A CON14.B MAX7.2 R49.1
BIAS8: CON15.A CON15.B MAX8.2 R51.1
BIAS9: CON16.A CON16.B MAX9.2 R53.1
BIAS10: CON17.A CON17.B MAX10.2 R55.1
BIAS11: CON18.A CON18.B MAX11.2 R57.1
BIAS12: CON20.A CON20.B MAX13.2 R61.1
BIAS13: CON21.A CON21.B MAX14.2 R63.1
BIAS14: CON22.A CON22.B MAX15.2 R65.1
BIAS15: CON23.A CON23.B MAX16.2 R67.1
BIAS16: CON24.A CON24.B MAX17.2 R69.1
BIAS17: CON25.A CON25.B MAX18.2 R71.1
BIAS18: CON26.A CON26.B MAX19.2 R73.1
BIAS19: CON27.A CON27.B MAX20.2 R75.1
BUT_BACK: C148.2 IC1.52 R92.2
BUT_DOWN: C22.2 IC1.53 R17.2
BUT_LEFT: C21.2 IC1.51 R15.2
BUT_OK: C25.2 IC1.56 R23.2
BUT_RIGHT: C23.2 IC1.55 R19.2
BUT_UP: C24.2 IC1.54 R21.2
CS_MAX1: IC2.12 MAX1.9 R77.2
CS_MAX2: IC2.11 MAX2.9
CS_MAX3: IC2.10 MAX3.9
CS_MAX4: IC2.9 MAX4.9
CS_MAX5: IC2.8 MAX5.9
CS_MAX6: IC2.7 MAX6.9
CS_MAX7: IC2.6 MAX7.9
CS_MAX8: IC2.5 MAX8.9
CS_MAX9: IC2.4 MAX9.9
CS_MAX10: IC2.3 MAX10.9
CS_MAX11: IC2.2 MAX11.9
CS_MAX12: IC2.1 MAX12.9
CS_MAX13: IC2.48 MAX13.9
CS_MAX14: IC2.47 MAX14.9
CS_MAX15: IC2.46 MAX15.9
CS_MAX16: IC2.45 MAX16.9
CS_MAX17: IC2.25 MAX17.9
CS_MAX18: IC2.26 MAX18.9
CS_MAX19: IC2.27 MAX19.9
CS_MAX20: IC2.28 MAX20.9
CS_MUX: IC1.23 U5.3
CS_MUX_3V3: IC2.20 U5.4
CS_SD: IC1.41 U2.1
CS_SD_3V3: CON7.2 U2.6
DB4: IC1.60 LCD1.11
DB5: IC1.59 LCD1.12
DB6: IC1.58 LCD1.13
DB7: IC1.57 LCD1.14
EN_MUX: IC1.25 U3.3
EN_MUX_3V3: IC2.22 U3.4
GND: B1.- B_BACK.1 B_BACK.3 B_DOWN.1 B_DOWN.3 B_LEFT.1 B_LEFT.3 B_OK.1 B_OK.3 B_RESET.1 B_RESET.3 B_RIGHT.1 B_RIGHT.3 B_UP.1 B_UP.3 BAT1.2- C2.2 C3.2 C4.1 C5.2 C6.1 C7.2 C8.2 C9.2 C10.2 C12.2 C13.2 C14.2 C15.1 C16.2 C17.2 C18.2 C19.2 C20.2 C21.1 C22.1 C23.1 C24.1 C25.1 C26.2 C27.2 C28.2 C29.2 C30.2 C31.2 C32.2 C33.2 C34.1 C35.2 C36.2 C37.2 C38.2 C39.2 C40.1 C41.2 C42.2 C43.2 C44.2 C45.2 C47.2 C48.1 C49.2 C50.2 C52.2 C53.1 C54.2 C55.2 C57.2 C58.1 C59.2 C60.2 C62.2 C63.1 C64.2 C65.2 C67.2 C68.1 C69.2 C70.2 C72.2 C73.1 C74.2 C75.2 C77.2 C78.1 C79.2 C80.2 C82.2 C83.1 C84.2 C85.2 C87.2 C88.1 C89.2 C90.2 C92.2 C93.1 C94.2 C95.2 C97.2 C98.1 C99.2 C100.2 C102.2 C103.1 C104.2 C105.2 C107.2 C108.1 C109.2 C110.2 C112.2 C113.1 C114.2 C115.2 C117.2 C118.1 C119.2 C120.2 C122.2 C123.1 C124.2 C125.2 C127.2 C128.1 C129.2 C130.2 C132.2 C133.1 C134.2 C135.2 C136.2 C137.2 C139.2 C140.2 C141.2 C142.2 C143.2 C144.2 C145.2 C146.2 C147.2 C148.1 C149.1 C150.1 C151.2 CON3.2 CON4.2 CON5.2 CON7.6 CON7.9 CON7.11 CON7.12 CON7.13 CON7.14 CON28.2 CON29.2 CON30.2 CON31.2 CON33.2 CON34.2 D1.A D2.1 D3.1 IC1.11 IC1.32 IC1.62 IC1.81 IC1.99 IC2.23 IC2.24 IC3.3 INA1.1 INA1.2 INA1.7 INA2.2 INA2.7 JP1.6 JP4.1 JP4.2 JP5.1 JP5.2 JTAG1.2 JTAG1.10 LCD1.1 LCD1.16 LED1.C LED2.C LED3.C LED_SD.C MAX1.1 MAX1.14 MAX2.1 MAX2.14 MAX3.1 MAX3.14 MAX4.1 MAX4.14 MAX5.1 MAX5.14 MAX6.1 MAX6.14 MAX7.1 MAX7.14 MAX8.1 MAX8.14 MAX9.1 MAX9.14 MAX10.1 MAX10.14 MAX11.1 MAX11.14 MAX12.1 MAX12.14 MAX13.1 MAX13.14 MAX14.1 MAX14.14 MAX15.1 MAX15.14 MAX16.1 MAX16.14 MAX17.1 MAX17.14 MAX18.1 MAX18.14 MAX19.1 MAX19.14 MAX20.1 MAX20.14 POT1.1 R6.1 R8.1 RTC1.5 SERIAL.1 TVS1.3 U1.1 U1.10 U1.17 U1.19 U2.2 U2.3 U3.2 U5.2 VR2.3 VR3.1 VR4.4 VREF_ON.C Y1.2
LED2: IC1.69 R27.2
LED3: IC1.68 R28.2
LED_SD: IC1.42 R31.2
MES_5V3: C137.1 CON34.1 D3.3 IC1.94
MES_5V4: C136.1 CON33.1 D2.3 IC1.95
MES_24V1: C9.1 IC1.84 R1.1 R6.2
MES_24V2: C10.1 IC1.83 R7.1 R8.2
MISO_3V3: CON7.7 IC3.2 MAX1.11 MAX2.11 MAX3.11 MAX4.11 MAX5.11 MAX6.11 MAX7.11 MAX8.11 MAX9.11 MAX10.11 MAX11.11 MAX12.11 MAX13.11 MAX14.11 MAX15.11 MAX16.11 MAX17.11 MAX18.11 MAX19.11 MAX20.11 R93.2
MISO_5V: IC1.22 IC3.4 JP1.1
MOSI_3V3: CON7.3 MAX1.12 MAX2.12 MAX3.12 MAX4.12 MAX5.12 MAX6.12 MAX7.12 MAX8.12 MAX9.12 MAX10.12 MAX11.12 MAX12.12 MAX13.12 MAX14.12 MAX15.12 MAX16.12 MAX17.12 MAX18.12 MAX19.12 MAX20.12 U1.9
MOSI_5V: IC1.21 JP1.4 R38.2 U1.11
MUX0: IC1.5 U1.2
MUX0_3V3: IC2.15 U1.18
MUX1: IC1.6 U1.4
MUX1_3V3: IC2.16 U1.16
MUX2: IC1.7 U1.6
MUX2_3V3: IC2.17 U1.14
MUX3: IC1.8 U1.8
MUX3_3V3: IC2.18 U1.12
MUX4: IC1.9 U5.1
MUX4_3V3: IC2.19 U5.6
N$1: F2.2 R7.2 TVS1.2
N$2: CON20.A1 CON20.B1 R60.1
N$3: CON7.8 R36.2
N$4: CON7.1 R37.2
N$5: CON21.A1 CON21.B1 R62.1
N$6: CON3.1 R9.1 R10.1
N$7: CON19.A1 CON19.B1 R58.1
N$8: F1.2 R1.2 TVS1.1
N$9: B1.AC2 C138.2 CON6.2 CON6.3
N$10: CON22.A1 CON22.B1 R64.1
N$11: B_LEFT.2 B_LEFT.4 R14.1 R15.1
N$12: B_DOWN.2 B_DOWN.4 R16.1 R17.1
N$13: B_RIGHT.2 B_RIGHT.4 R18.1 R19.1
N$14: B_UP.2 B_UP.4 R20.1 R21.1
N$15: B_OK.2 B_OK.4 R22.1 R23.1
N$16: CON23.A1 CON23.B1 R66.1
N$17: B_RESET.2 B_RESET.4 R12.1 R13.1
N$18: LED1.A R24.1
N$19: CON5.1 F2.1
N$20: LCD1.3 POT1.2
N$21: CON30.1 R87.1 R88.1
N$22: LED_SD.A R31.1
N$23: CON29.1 R85.1 R86.1
N$24: CON4.1 F1.1
N$25: CON1.A1 CON1.B1 R4.1
N$26: LED2.A R27.1
N$27: CON2.1 JP3.1 R34.1
N$28: CON2.2 JP2.3 R34.2
N$29: CON35.2 JP2.1
N$30: CON35.1 JP3.3
N$31: CON9.A1 CON9.B1 R11.1
N$32: LED3.A R28.1
N$33: CON10.A1 CON10.B1 R26.1
N$34: CON11.A1 CON11.B1 R32.1
N$35: CON12.A1 CON12.B1 R44.1
N$36: CON13.A1 CON13.B1 R46.1
N$37: CON14.A1 CON14.B1 R48.1
N$38: CON15.A1 CON15.B1 R50.1
N$39: CON16.A1 CON16.B1 R52.1
N$40: CON17.A1 CON17.B1 R54.1
N$41: CON18.A1 CON18.B1 R56.1
N$42: CON24.A1 CON24.B1 R68.1
N$43: CON25.A1 CON25.B1 R70.1
N$44: CON26.A1 CON26.B1 R72.1
N$45: CON27.A1 CON27.B1 R74.1
N$47: CON28.1 R83.1 R84.1
N$48: R76.1 VREF_ON.A
N$50: CON31.1 R89.1 R90.1
N$51: B_BACK.2 B_BACK.4 R91.1 R92.1
OE_BUF5V: IC1.39 IC3.1
PA0: IC1.78 JP7.4
PA1: IC1.77 JP7.3
PA2: IC1.76 JP7.2
PA3: IC1.75 JP7.1
PA4: IC1.74 JP6.4
PA5: IC1.73 JP6.3
PA6: IC1.72 JP6.2
PA7: IC1.71 JP6.1
R/!W!: IC1.17 LCD1.5
RESET: C34.2 IC1.30 JP1.5 JTAG1.6 R13.2
RS: IC1.16 LCD1.4
RST_RTC: IC1.45 RTC1.4
RXD0: IC1.2 SERIAL.2
SCK_3V3: CON7.5 MAX1.10 MAX2.10 MAX3.10 MAX4.10 MAX5.10 MAX6.10 MAX7.10 MAX8.10 MAX9.10 MAX10.10 MAX11.10 MAX12.10 MAX13.10 MAX14.10 MAX15.10 MAX16.10 MAX17.10 MAX18.10 MAX19.10 MAX20.10 U1.7
SCK_5V: IC1.20 JP1.3 U1.13
SCL: IC1.43 INA1.5 INA2.5 R2.1 RTC1.8
SD_DETECT: CON7.10 IC1.40 R30.1
SDA: IC1.44 INA1.4 INA2.4 R3.1 RTC1.7
SHDN_VREF: IC1.70 VR4.3
SS_3V3: IC2.43 U1.5
SS_5V: IC1.19 R39.2 U1.15
T+: C1.2 C5.1 MAX1.4 R4.2
T+1: C11.2 C12.1 MAX2.4 R11.2
T+2: C46.2 C47.1 MAX3.4 R26.2
T+3: C51.2 C52.1 MAX4.4 R32.2
T+4: C91.2 C92.1 MAX12.4 R58.2
T+5: C56.2 C57.1 MAX5.4 R44.2
T+6: C61.2 C62.1 MAX6.4 R46.2
T+7: C66.2 C67.1 MAX7.4 R48.2
T+8: C71.2 C72.1 MAX8.4 R50.2
T+9: C76.2 C77.1 MAX9.4 R52.2
T+10: C81.2 C82.1 MAX10.4 R54.2
T+11: C86.2 C87.1 MAX11.4 R56.2
T+12: C96.2 C97.1 MAX13.4 R60.2
T+13: C101.2 C102.1 MAX14.4 R62.2
T+14: C106.2 C107.1 MAX15.4 R64.2
T+15: C111.2 C112.1 MAX16.4 R66.2
T+16: C116.2 C117.1 MAX17.4 R68.2
T+17: C121.2 C122.1 MAX18.4 R70.2
T+18: C126.2 C127.1 MAX19.4 R72.2
T+19: C131.2 C132.1 MAX20.4 R74.2
T-: C1.1 C6.2 MAX1.3 R5.2
T-1: C11.1 C15.2 MAX2.3 R25.2
T-2: C46.1 C48.2 MAX3.3 R29.2
T-3: C51.1 C53.2 MAX4.3 R33.2
T-4: C91.1 C93.2 MAX12.3 R59.2
T-5: C56.1 C58.2 MAX5.3 R45.2
T-6: C61.1 C63.2 MAX6.3 R47.2
T-7: C66.1 C68.2 MAX7.3 R49.2
T-8: C71.1 C73.2 MAX8.3 R51.2
T-9: C76.1 C78.2 MAX9.3 R53.2
T-10: C81.1 C83.2 MAX10.3 R55.2
T-11: C86.1 C88.2 MAX11.3 R57.2
T-12: C96.1 C98.2 MAX13.3 R61.2
T-13: C101.1 C103.2 MAX14.3 R63.2
T-14: C106.1 C108.2 MAX15.3 R65.2
T-15: C111.1 C113.2 MAX16.3 R67.2
T-16: C116.1 C118.2 MAX17.3 R69.2
T-17: C121.1 C123.2 MAX18.3 R71.2
T-18: C126.1 C128.2 MAX19.3 R73.2
T-19: C131.1 C133.2 MAX20.3 R75.2
TCK: IC1.93 JTAG1.1 R43.2
TDI: IC1.90 JTAG1.9 R42.2
TDO: IC1.91 JTAG1.3 R40.2
THERM1: C16.1 IC1.89 R10.2
THERM2: C141.1 IC1.88 R83.2
THERM3: C142.1 IC1.87 R85.2
THERM4: C143.1 IC1.86 R87.2
THERM5: C144.1 IC1.85 R89.2
TMS: IC1.92 JTAG1.5 R41.2
TXD0: IC1.3 SERIAL.3
VALIM: B1.+ C13.1 C26.1 C27.1 C39.1 D1.C R24.2 VR2.1 VR4.2
VBAT: BAT1.1+ RTC1.6
VIN1+: INA1.8 INA1.10 JP2.2
VIN1-: INA1.9 JP3.2
VIN2+: CON8.2 INA2.8 INA2.10 R95.2
VIN2-: CON8.1 INA2.9 R95.1
WR_MUX: IC1.24 U3.1
WR_MUX_3V3: IC2.21 U3.6
XTAL1: IC1.34 R35.1 Y1.3
XTAL2: IC1.33 R35.2 Y1.1